# EAGLE board PCB-SPKTRLIGHT (EAGLE 6.2)
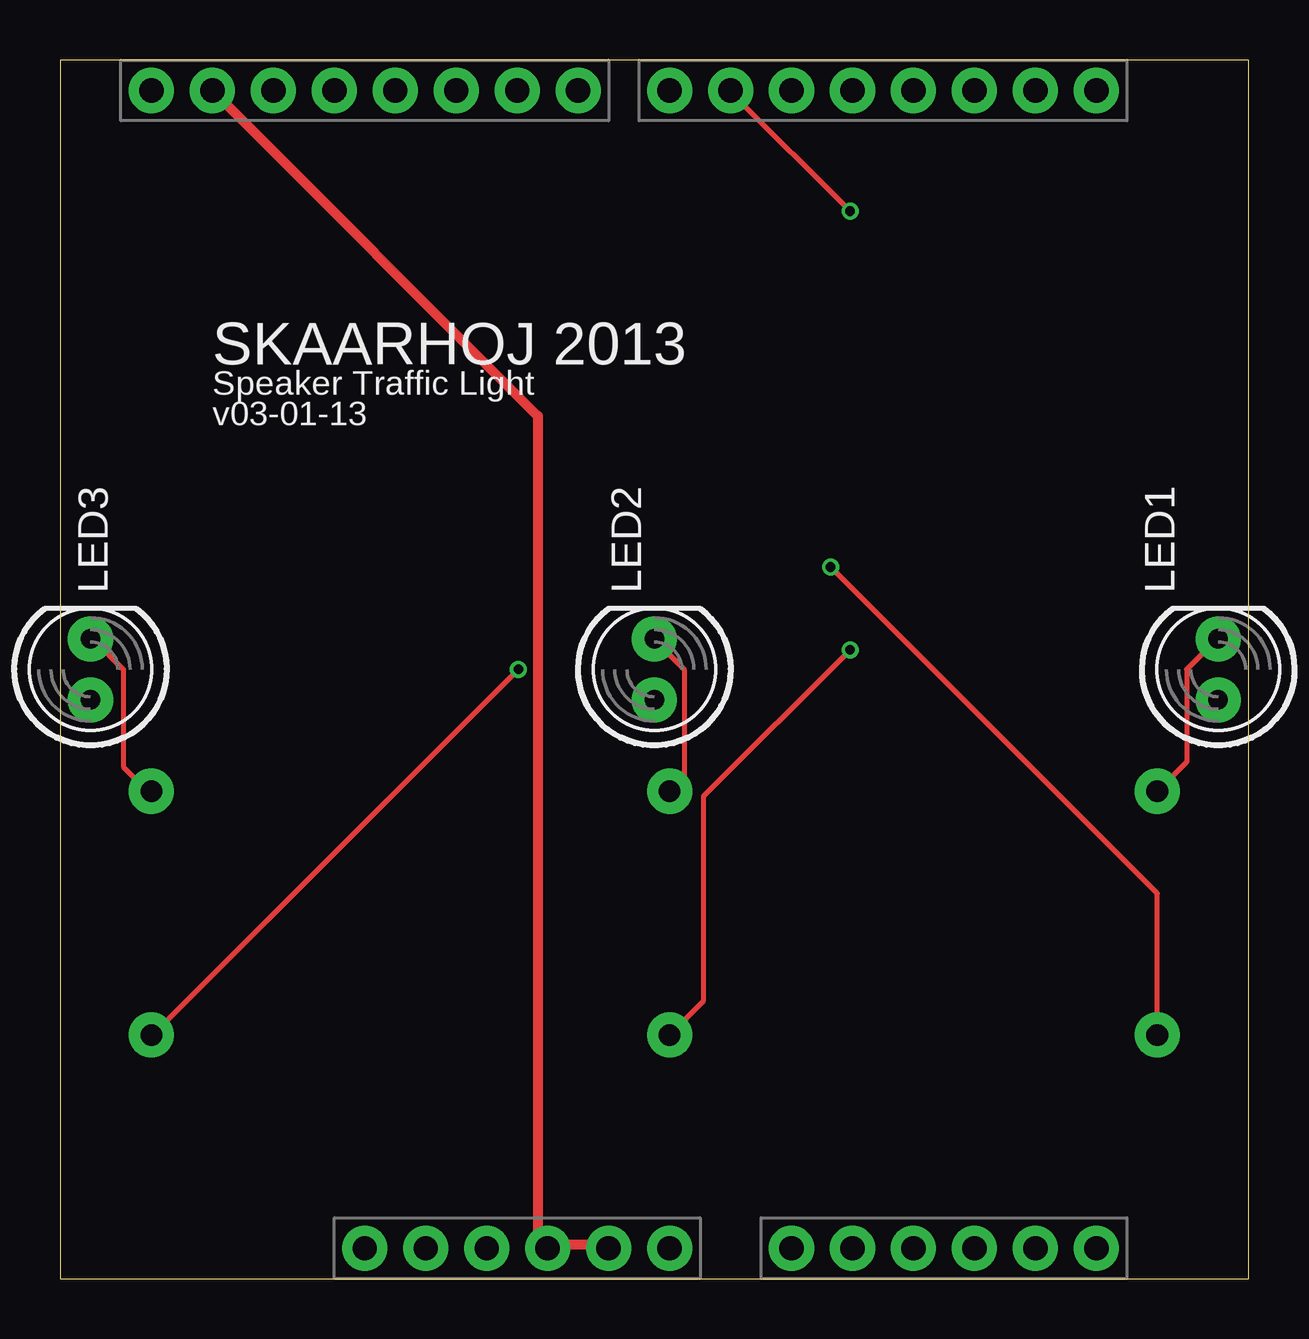
[diagram p0: board, top side]
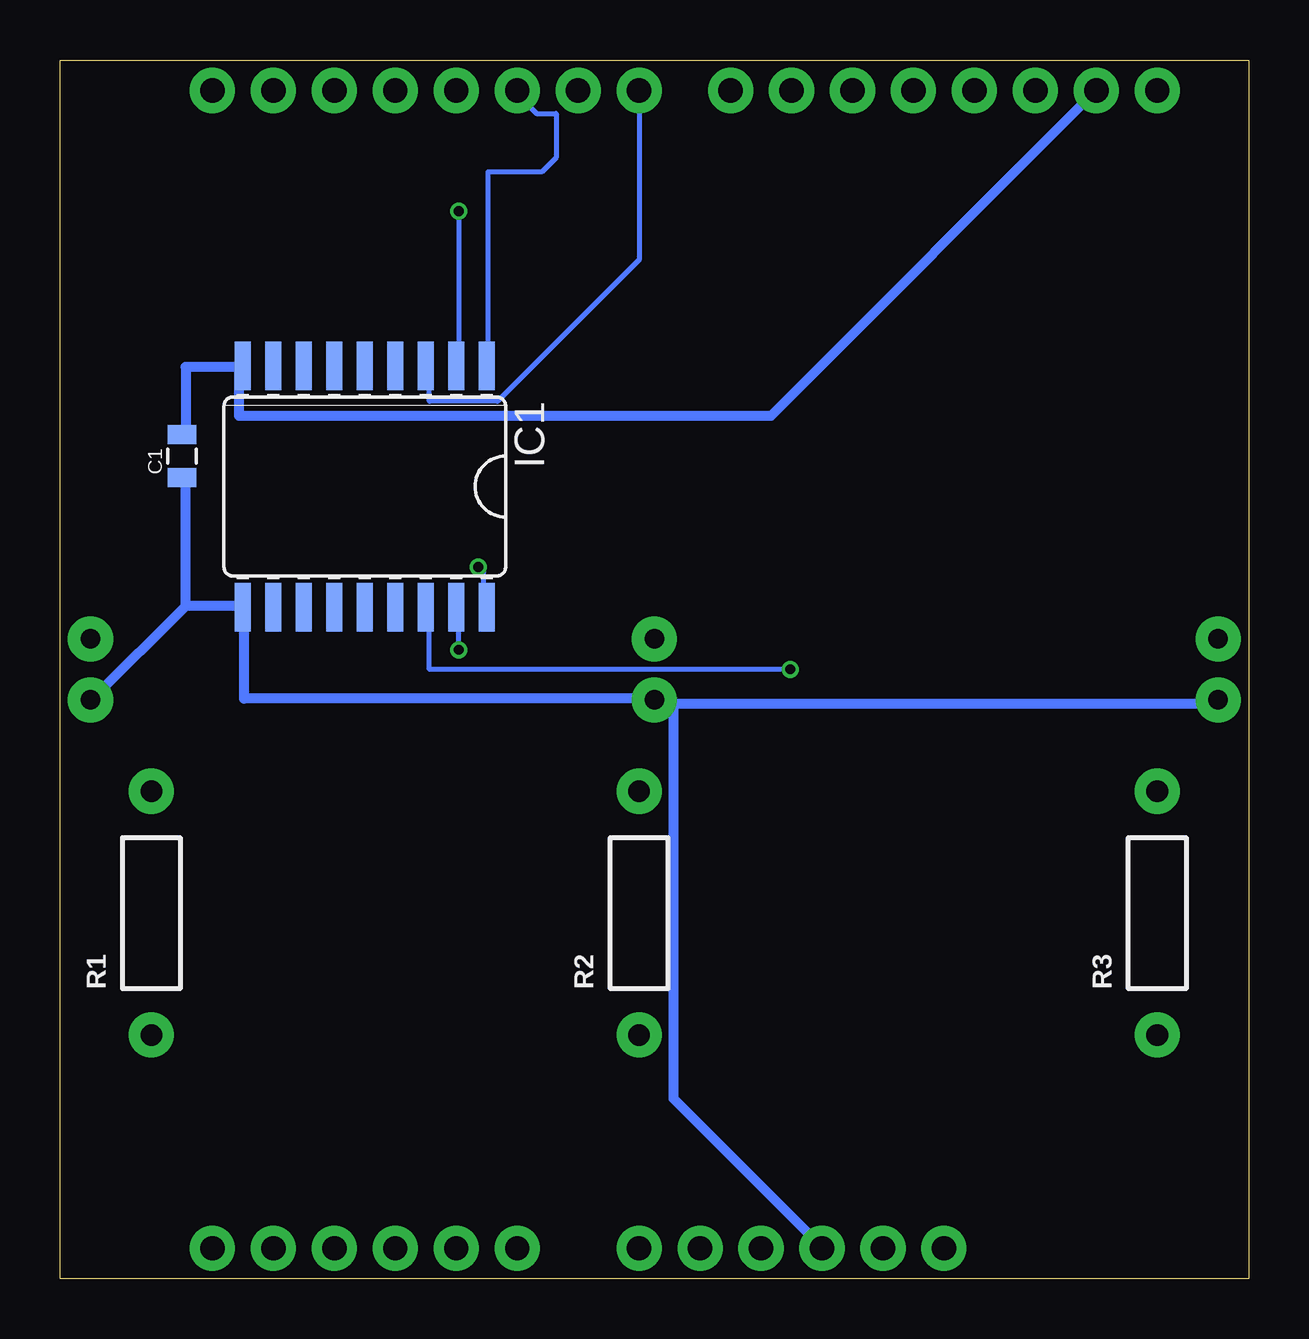
[diagram p1: board, bottom side, seen from below]

Size 49.53 x 50.8 mm. Coordinates in mm from the lower left corner, seen from the top.
Outline: 0,0 49.53,0 49.53,50.8 0,50.8 0,0
Copper layers (1*16): Top 0.035mm / dielectric 1.5mm / Bottom 0.035mm
Design rules: minimum track width 6mil, minimum drill 12mil, track to track 6mil, track to pad 6mil, pad to pad 6mil, via to via 6mil, smd to smd 0mil, copper to edge 10mil, drill to drill 10mil, minimum pad ring 10mil, minimum via ring 6mil, stop-mask expansion 2mil, vias tented up to drill 100mil, thermal gap 10mil
Net classes: 0 default: width 0.203 mm, drill 0.406 mm, clearance 0.203 mm; 1 PWR: width 0.406 mm, drill 0.61 mm, clearance 0.203 mm

## Footprints (pad centres in the part's own frame; a part is rotated, then mirrored left to right if it is on the bottom)
0805 = smd 0.8 x 1.2: 1 -0.9,0; 2 0.9,0
SO18W = smd 0.66 x 2.032: 1 -5.08,-5.029; 2 -3.81,-5.029; 3 -2.54,-5.029; 4 -1.27,-5.029; 5 0,-5.029; 6 1.27,-5.029; 7 2.54,-5.029; 8 3.81,-5.029; 9 5.08,-5.029; 10 5.08,5.029; 11 3.81,5.029; 12 2.54,5.029; 13 1.27,5.029; 14 0,5.029; 15 -1.27,5.029; 16 -2.54,5.029; 17 -3.81,5.029; 18 -5.08,5.029
LED5MM = drill 0.813 pad 1.88: A -1.27,0; K 1.27,0
AXIAL-0.4 = drill 0.9 pad 1.88: P$1 -5.08,0; P$2 5.08,0
DUEMILANOVE_VIAS = drill 1.016 pad 1.88: 3.3V 50.8,13.97; 5V 50.8,16.51; A0 50.8,29.21; A1 50.8,31.75; A2 50.8,34.29; A3 50.8,36.83; A4 50.8,39.37; A5 50.8,41.91; AREF 2.54,2.54; D2 2.54,36.83; D3 2.54,34.29; D4 2.54,31.75; D5 2.54,29.21; D6 2.54,26.67; D7 2.54,24.13; D8 2.54,20.32; D9 2.54,17.78; D10 2.54,15.24; D11 2.54,12.7; D12 2.54,10.16; D13 2.54,7.62; GND@0 50.8,19.05; GND@1 50.8,21.59; GND@2 2.54,5.08; RES 50.8,11.43; RX 2.54,41.91; TX 2.54,39.37; VIN 50.8,24.13

## Placement (x,y rotation side)
C1  100nF  [0805]  44.45,34.29 90 bottom
IC1  ULN2803A  [SO18W]  36.83,33.02 180 bottom
LED1  RED  [LED5MM]  48.26,25.4 90 top
LED2  YELLOW  [LED5MM]  24.77,25.4 90 top
LED3  GREEN  [LED5MM]  1.27,25.4 90 top
R1  [AXIAL-0.4]  45.72,15.24 90 bottom
R2  [AXIAL-0.4]  25.4,15.24 90 bottom
R3  [AXIAL-0.4]  3.81,15.24 90 bottom
U1  ARDUINO_SHIELDNO_SILK  [DUEMILANOVE_VIAS]  1.27,52.07 270 top

## Library data of the parts
C1 LED1-LED3 R1-R3 U1 = SparkFun
IC1 = uln-udn

## Nets
5V [PWR]: C1.1 IC1.10 LED1.A LED2.A LED3.A U1.5V
D5IN: IC1.1 U1.D5
D6IN: IC1.2 U1.D6
D7IN: IC1.3 U1.D7
GND [PWR]: C1.2 IC1.9 U1.GND@0 U1.GND@1 U1.GND@2
GRNSINK: IC1.16 R3.P$1
N$1: LED1.K R1.P$2
N$2: LED2.K R2.P$2
N$3: LED3.K R3.P$2
REDSINK: IC1.18 R1.P$1
YELSINK: IC1.17 R2.P$1

## Tracks (layer width: path | path; a pad name or v marks a point on that pad's centre or on a via)
5V
  Bottom 0.406: 44.3,28.04 44.3,33.33 C1.1 | 44.3,28.04 42.06,28.04 IC1.10 41.86,27.84 41.86,24.18 24.79,24.18 LED2.A | 44.3,28.04 48.16,24.18 LED1.A | 23.98,23.98 23.98,7.52 17.88,1.42 U1.5V | 23.98,23.98 24.59,23.98 LED2.A | 23.98,23.98 1.42,23.98 LED3.A | 23.98,23.98 LED2.A
D5IN
  Bottom 0.203: IC1.1 31.7,38.2 31.7,46.13 29.46,46.13 28.85,46.74 28.85,48.56 29.67,48.56 30.48,49.38 U1.D5
D6IN  (via drill 0.41)
  Top 0.203: v32.92,44.5 28.04,49.38 U1.D6
  Bottom 0.203: v32.92,44.5 32.92,38.2 IC1.2
D7IN
  Bottom 0.203: U1.D7 25.4,42.47 31.29,36.58 34.14,36.58 34.14,38 IC1.3
GND
  Top 0.406: 20.32,1.42 22.76,1.42 U1.GND@1 | 20.32,1.42 19.91,1.83 19.91,35.97 U1.GND@2 | 20.32,1.42 U1.GND@0
  Bottom 0.406: C1.2 44.3,35.36 44.3,38 42.06,38 IC1.9 42.06,37.8 42.06,35.97 19.91,35.97 U1.GND@2
GRNSINK  (via drill 0.41)
  Top 0.203: v19.1,25.4 3.86,10.16 R3.P$1
  Bottom 0.203: v19.1,25.4 34.14,25.4 34.14,27.84 IC1.16
N$1
  Top 0.203: R1.P$2 46.94,21.54 46.94,25.4 48.16,26.62 LED1.K
N$2
  Top 0.203: R2.P$2 26.01,20.93 26.01,25.4 24.79,26.62 LED2.K
N$3
  Top 0.203: R3.P$2 3.66,20.32 2.64,21.34 2.64,25.4 1.42,26.62 LED3.K
REDSINK  (via drill 0.41)
  Top 0.203: v32.11,29.67 45.72,16.05 R1.P$1
  Bottom 0.203: v32.11,29.67 31.9,29.67 31.9,28.04 IC1.18
YELSINK  (via drill 0.41)
  Top 0.203: v32.92,26.21 26.82,20.12 26.82,11.58 R2.P$1
  Bottom 0.203: v32.92,26.21 32.92,27.84 IC1.17

## Text on the board
_tsilk: SKAARHOJ 2013 | Speaker Traffic Light | v03-01-13